# Altium PCB RS485_V1.0.PcbDoc
Units mm, origin at the board's own origin, x right, y up, seen from the top; angles counter-clockwise.
Board outline 35.56 x 20.07 mm, 2 copper layers (Top Layer, Bottom Layer); 16 components, 10 nets, 38 pads, 11 vias.
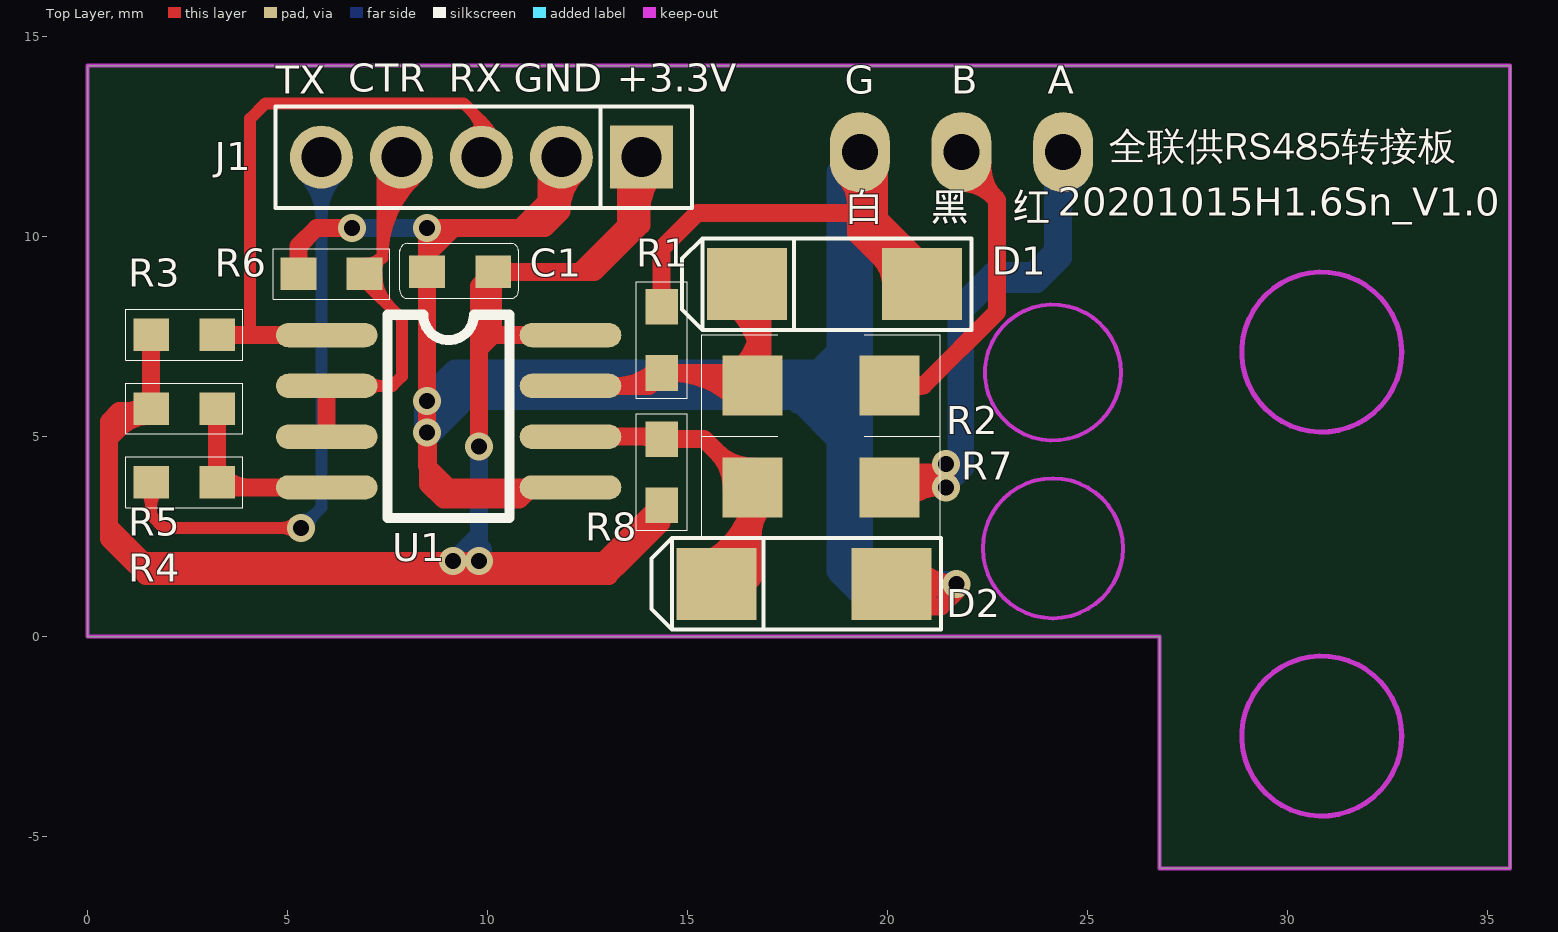
[diagram p0: Top Layer view]
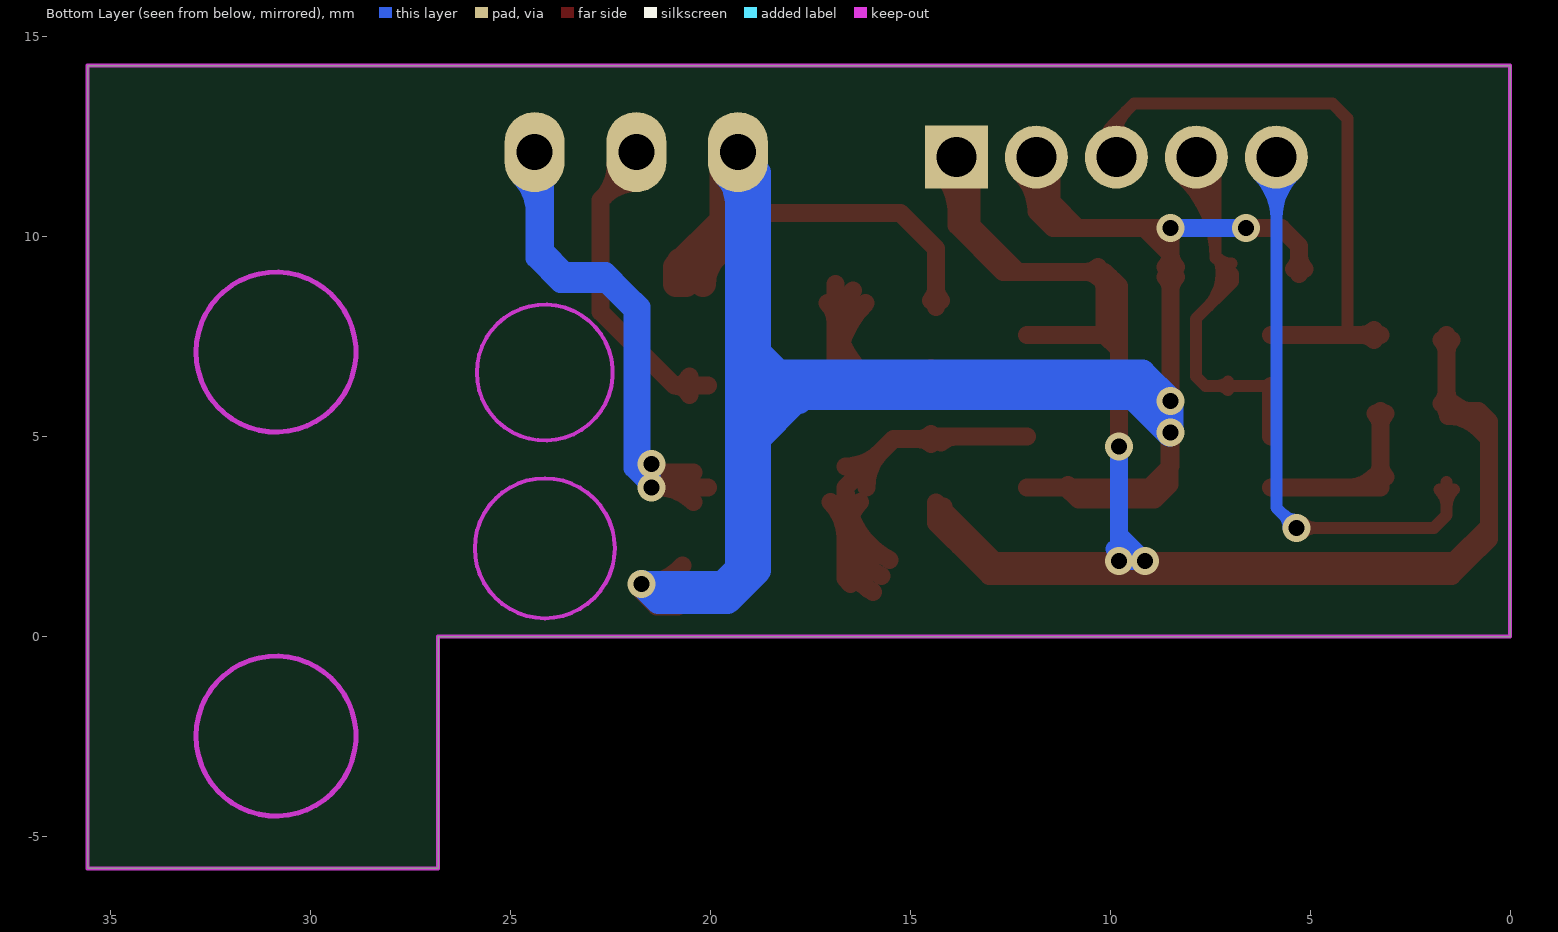
[diagram p1: Bottom Layer view, seen from below]
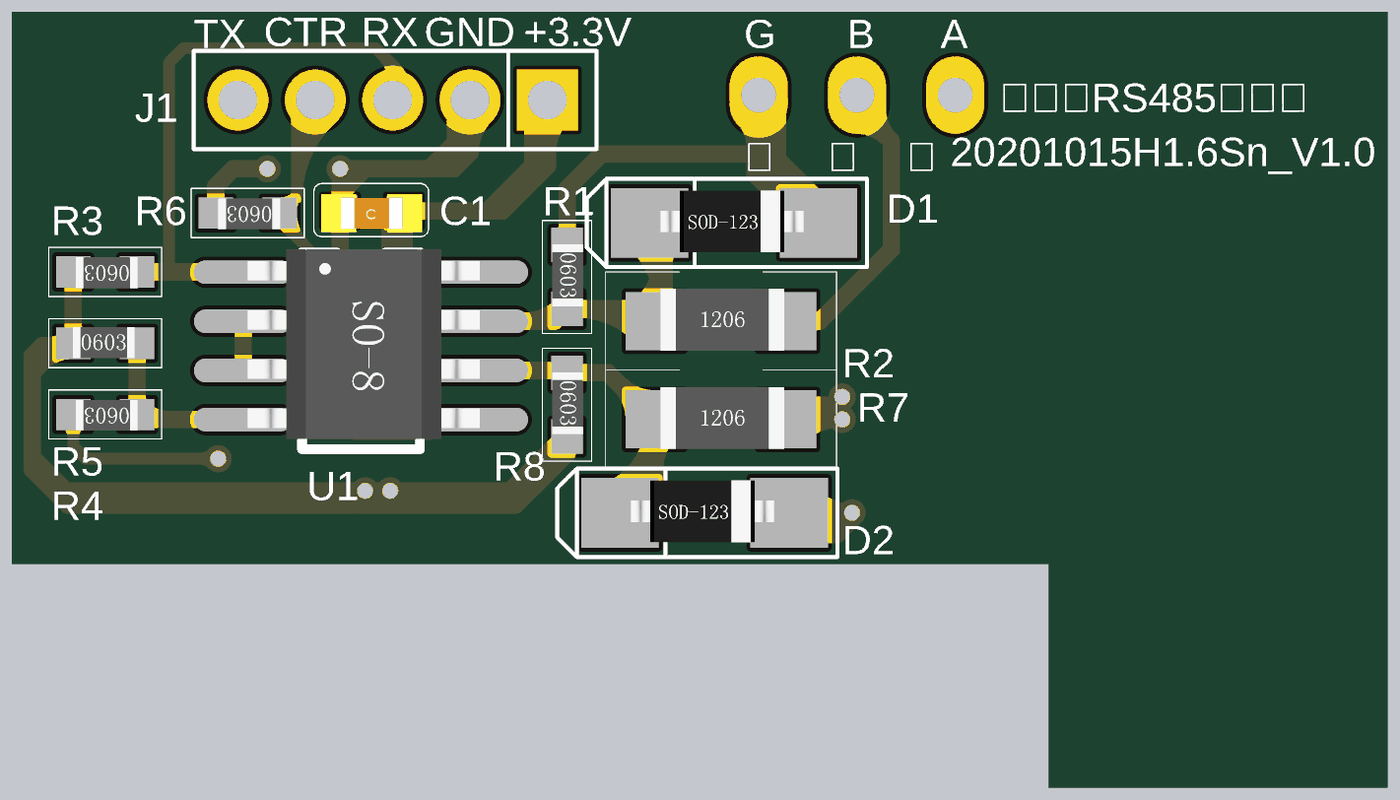
[diagram p2: 3D render of the assembled board from above, using the file's embedded part models]

## Layer stack, top to bottom
Top Layer: signal copper 0.0356
Dielectric: dielectric 0.32, FR-4, Dk 4.8
Bottom Layer: signal copper 0.0356

## Board outline
0,14.277 35.56,14.277 35.56,-5.789 26.797,-5.789 26.797,0 0,0 0,14.277

## Design rules (kind name [scope] priority, off if disabled: settings)
Clearance Clearance_1 [InPolygon] p1: gap=0.6
Clearance [All] p2: gap=0.254
HoleSize [All] p1 off: absolutevalues=TRUE maxlimit=2.54 minlimit=0.025 maxpercent=80.000 minpercent=20.000
HoleToHoleClearance [All] p1 off: gap=0.254 allowstackedmicrovias=TRUE
LayerPairs [All] p1 off: enforce=TRUE
MinimumSolderMaskSliver [All] p1 off: minsoldermaskwidth=0.254
NetAntennae [All] p1 off: netantennaetolerance=0
PolygonConnect PolygonConnect_1 [IsVia] p1: connectstyle=Direct reliefconductorwidth=0.254 reliefentries=4 polygonreliefangle="90 Angle"
PolygonConnect [All] p2: connectstyle=Relief reliefconductorwidth=0.5 reliefentries=4 polygonreliefangle="90 Angle"
RoutingVias [All] p1: holewidth=0.711 width=1.27 viastyle="Through Hole" minholewidth=0.711 minwidth=1.27 maxholewidth=0.711 maxwidth=1.27
SilkToSilkClearance [All] p1 off: silktosilkclearance=0.254
SilkscreenOverComponentPads [All] p1 off: minsilkscreentomaskgap=0.254
SolderMaskExpansion [All] p1: expansion=0.102
Width [All] p1: maxlimit=1.5 minlimit=0.3 preferedwidth=0.65
21 further rules are at their usual default settings.

## Components (designator, comment, footprint, x,y, rotation, side; value= is the part's Value field where it differs from the comment)
C1 "0.1uF/0603" CAP/SMT/0603C 8.509,9.07 r0 top
D1 "SMF6.5CA/SOD-123" D/SMT/SOD123 16.256,8.816 r0 top
D2 "SMF6.5CA/SOD-123" D/SMT/SOD123 15.494,1.323 r0 top
J1 "1X5PIN_2.54MM" CON/DIP/1×5PIN/2.0MM 13.843,11.991 r180 top
R1 "10K/0603" 0603R 14.351,7.419 r270 top
R2 "10K/1206" 1206R 16.637,6.276 r0 top
R3 "10K/0603" 0603R 2.413,7.546 r180 top
R4 "100R/0603" 0603R 2.413,3.863 r180 top
R5 "10K/0603" 0603R 2.413,5.704 r0 top
R6 "10K/0603" 0603R 6.096,9.07 r180 top
R7 "10K/1206" 1206R 16.637,3.736 r0 top
R8 "10K/0603" 0603R 14.351,4.117 r270 top
U1 "SP3485EN" SOIC-8 5.969,7.546 r0 top
白 "1PIN" CON/DIP/1PIN 21.844,12.118 r90 top (schematic designator J3)
红 "1PIN" CON/DIP/1PIN 24.384,12.118 r90 top (schematic designator J4)
黑 "1PIN" CON/DIP/1PIN 19.304,12.118 r90 top (schematic designator J2)

## Footprints (in the part's own frame and the unit in brackets; to place one, negate y for a bottom-side part, rotate by r counter-clockwise, add the part's x,y. Pads: shape width x height; smd on the part's side, far side on the other; paste and mask are expansions set on the pad)
0603R [mil]
  rect 35x32 smd: 1(-32.5,0) 2(32.5,0)
  silkscreen extent -58,-25 58,25, body extent -33,-15 30,16, height 18
1206R [mm]
  rect 1.5x1.5 smd: 1(-0.02,0) 2(3.409,0)
  silkscreen extent -1.29,-1.27 4.68,1.27, body extent 0.13,-0.76 3.33,0.84, height 0.6
CAP/SMT/0603C [mil]
  rect 35x32 smd: 1(-1,1.97) 2(64,1.97)
  silkscreen extent -28,-24 89,30, body extent -20,-20 82,19, height 35
CON/DIP/1PIN [mm]
  oval 2x1.5 hole 0.9: 1(0,0)
CON/DIP/1×5PIN/2.0MM [mil]
  rect 62x62 hole 39.37 mask+4: 1(0,0)
  round 62 hole 39.37 mask+4: 2(78.74,0) 3(157.48,0) 4(236.22,0) 5(314.96,0)
  silkscreen extent -50,-50 360,50
D/SMT/SOD123 [mm]
  rect 2x1.8 smd: 1(0.229,0) 2(4.597,0)
  silkscreen extent -1.4,-1.14 5.84,1.14, body extent 0.51,-0.76 4.21,0.84, height 1.2
SOIC-8 [mil]
  oval 100x24 smd: 1(0.27,-0.17) 2(0.27,-50.17) 3(0.27,-100.17) 4(0.27,-150.17) 5(240.27,-150.17) 6(240.27,-100.17) 7(240.27,-50.17) 8(240.27,-0.17)
  silkscreen extent 60,-180 180,20, body extent 5,-170 241,23, height 67

## Part data
C1: library part CAP/CAP/SMT/0603C
D1 D2: library part D/TVS/SMT/SMF13CA/SOD-123
J1: library part CON/DIP/1X5PIN_2.54MM, "Connector"
R1 R3 R4 R5 R6 R8: library part RES/RES/SMT/0603
R2 R7: library part RES/RES/SMT/1206
U1: library part SP485EN
白 红 黑: library part CON/DIP/1PIN, "Connector"

## Via types
v1: diameter 0.7, hole 0.4, Top Layer to Bottom Layer, tented both sides, 11 vias

## Nets (pads, with @x,y where several pads share a name; then routed paths per layer and width w, separated by ;. In a path a pad name is that pad's centre, name@x,y a point inside that pad or via, vN(x,y) a via of type N, cw(c..) or ccw(c..) an arc to the next point about the centre after c; other vN are vias at no path point)
+3.3V: C1.2 J1.1 R3.2 R5.1 R8.2 U1.8 | length 79.7
  Top Layer w0.45: 0.529,4.953 1.281,5.704 R5.1 ; 0.781,5.205 cw(c1.549,4.436) R5.1@1.549,5.523 ; 0.958,5.641 ccw(c0.958,6.296) R5.1@1.421,5.833 ; 1.397,1.891 0.529,2.759 0.529,2.921 ; R5.1@1.459,5.833 ccw(c1.15,6.142) 1.587,6.142 ccw(c2.025,6.142) R5.1@1.716,5.833 ; R3.2@1.459,7.418 cw(c1.15,7.108) 1.587,7.108 cw(c2.025,7.108) R3.2@1.716,7.418 ; R3.2 1.587,5.641 0.783,5.641 0.529,5.387 0.529,2.921 ; 7.942,1.524 ccw(c7.942,3.079) v1@9.042,1.979 ; 8.591,1.524 ccw(c8.591,3.079) v1@9.691,1.979 ; v1@8.9,1.661 ccw(c9.231,1.992) 9.231,1.524 ; 9.029,1.524 ccw(c9.029,1.992) v1@9.36,1.661 ; v1@9.218,1.979 ccw(c10.318,3.079) 10.318,1.524 ; v1@9.549,1.661 ccw(c9.88,1.992) 9.88,1.524 ; 9.678,1.524 ccw(c9.678,1.992) v1@10.009,1.661 ; v1(9.779,4.752) 9.779,7.186 ; 9.779,7.916 cw(c11.301,7.916) C1.2@10.225,8.992 ; v1@9.867,1.979 ccw(c10.967,3.079) 10.967,1.524 ; C1.2@10.006,8.992 cw(c9.697,8.682) 10.135,8.682 cw(c10.573,8.682) C1.2@10.263,8.992 ; C1.2@10.301,8.992 cw(c10.611,8.682) 10.611,9.12 cw(c10.611,9.558) C1.2@10.301,9.248 ; U1.8 10.135,7.542 ; J1.1@13.445,11.593 cw(c12.485,10.633) 13.843,10.633 cw(c15.201,10.633) J1.1@14.241,11.593 ; 13.462,10.245 cw(c14.987,10.245) J1.1@14.151,11.521 ; 13.462,11.078 cw(c14.441,11.078) J1.1@13.905,11.897 ; 13.754,2.25 ccw(c12.751,3.253) R8.2@14.17,3.253 ; 13.868,2.872 cw(c14.351,2.389) R8.2@14.351,3.072 ; 0.529,2.921 0.529,2.445 1.083,1.891 ; 1.083,1.891 12.954,1.891 ; 1.083,1.891 1.45,1.524 13.028,1.524 13.395,1.891 ; 9.779,7.186 10.135,7.542 ; 9.779,7.186 9.779,8.764 C1.2 ; 10.135,7.542 C1.2 ; C1.2 11.938,9.12 ; 11.938,9.12 12.676,9.12 13.843,10.287 J1.1 13.462,11.61 13.462,10.287 12.295,9.12 11.938,9.12 ; 12.954,1.891 13.395,1.891 ; 12.954,1.891 12.954,1.958 14.351,3.355 14.351,2.847 13.395,1.891
  Bottom Layer w0.45: v1@9.306,2.067 cw(c9.7,1.673) v1@9.89,2.197 ; v1(9.779,4.752) 9.779,2.54 ; 9.779,2.54 v1(9.779,1.891) v1(9.13,1.891) 9.779,2.54
GND: C1.1 D1.2 D2.2 J1.2 R1.1 R6.2 U1.5 黑.1 | length 171
  Top Layer w0.45: R6.2@5.142,9.198 ccw(c4.833,9.508) 5.271,9.508 ccw(c5.708,9.508) R6.2@5.399,9.198 ; R6.2 5.271,9.768 5.715,10.213 v1(6.604,10.213) ; C1.1@8.355,8.992 cw(c8.046,8.682) 8.484,8.682 cw(c8.922,8.682) C1.1@8.612,8.992 ; C1.1@8.355,9.248 ccw(c8.046,9.558) 8.484,9.558 ccw(c8.922,9.558) C1.1@8.612,9.248 ; v1@8.395,5.017 cw(c8.12,4.742) 8.509,4.742 ; v1@8.484,5.207 8.509,5.182 8.509,3.81 8.89,3.429 10.795,3.429 11.098,3.732 U1.5 12.068,3.736 9.017,3.736 8.484,4.269 C1.1 ; 9.144,10.213 8.484,9.553 C1.1 ; 10.183,3.429 ccw(c10.183,4.655) U1.5@11.05,3.788 ; J1.2@11.445,11.593 cw(c10.485,10.633) 11.843,10.633 cw(c13.201,10.633) J1.2@12.241,11.593 ; 11.467,10.823 cw(c12.101,10.823) J1.2@11.964,11.442 ; J1.2@11.843,11.43 11.843,11.261 11.467,10.885 ; R1.1@14.223,8.411 ccw(c13.913,8.721) 14.351,8.721 ccw(c14.789,8.721) R1.1@14.479,8.411 ; R1.1 14.351,9.705 15.24,10.594 19.304,10.594 ; 黑.1@18.933,11.497 cw(c18.037,10.601) 19.304,10.601 cw(c20.571,10.601) 黑.1@19.675,11.497 ; 黑.1 19.304,10.111 D1.2@20.599,8.816 ; 19.381,10.034 ccw(c20.693,11.346) D1.2@20.737,9.491 ; 19.71,9.705 cw(c18.82,8.816) D1.2@20.078,8.816 ; D2.2@20.69,1.777 ccw(c21.717,2.71) v1(21.717,1.323) ; D2.2@20.955,1.016 20.648,1.323 D2.2 v1(21.717,1.323) ; C1.1 v1(8.484,10.213) 10.795,10.213 ; 10.795,10.213 11.43,10.213 11.843,10.626 J1.2 11.467,11.615 11.467,10.885 ; 10.795,10.213 11.467,10.885 ; v1(21.717,1.323) ccw(c21.717,-0.064) 20.69,0.869 20.797,0.762 21.336,0.762 21.717,1.143 v1(21.717,1.323)
  Top Layer w0.65: 黑.1@19.003,11.567 cw(c18.278,10.842) 19.304,10.842 cw(c20.33,10.842) 黑.1@19.605,11.567 ; 黑.1@19.069,11.514 cw(c18.306,10.365) 19.685,10.365 ; 19.509,9.906 ccw(c20.753,11.151) D1.2@20.753,9.391 ; D1.2@19.88,9.535 cw(c19.162,8.816) D1.2@20.178,8.816 ; 19.304,10.111 黑.1 19.685,11.737 19.685,10.414 20.853,9.246 D1.2 20.599,8.816 19.304,10.111
  Bottom Layer w0.45: v1(6.604,10.213) v1(8.484,10.213) ; v1@8.609,5.895 cw(c9.028,5.895) 8.731,6.191 ; 9.271,6.223 9.144,6.35 8.89,6.35 ; 黑.1@18.933,11.497 cw(c18.037,10.601) 19.304,10.601 cw(c20.571,10.601) 黑.1@19.675,11.497 ; 19.304,5.895 17.78,5.895 v1(8.484,5.895) 8.484,5.944 8.89,6.35 ; 19.304,6.477 19.177,6.35 18.796,6.35 18.415,6.35 8.89,6.35 ; 黑.1 19.304,1.704 19.685,1.323 v1(21.717,1.323) 19.939,1.323
  Bottom Layer w0.65: v1@8.484,5.92 ccw(c8.484,8.009) 9.961,6.532 ; 9.144,6.35 18.415,6.35 ; 10.541,6.604 10.033,6.604 8.509,5.08 v1(8.484,5.105) v1(8.484,5.895) 9.193,6.604 18.923,6.604 19.304,6.985 ; 17.78,5.895 17.854,5.895 18.796,4.953 ; 18.796,6.35 18.796,1.651 19.558,0.889 21.283,0.889 v1(21.717,1.323) 19.685,1.323 19.304,1.704 黑.1 18.796,11.61 18.796,7.112 18.415,6.731 18.415,6.35 ; 18.796,9.616 cw(c21.556,9.616) 19.605,11.567 ccw(c20.33,10.842) 19.304,10.842 ccw(c18.278,10.842) 黑.1@19.003,11.567 ; 18.796,11.185 cw(c19.987,11.185) 黑.1@19.145,12.027 ; 19.304,5.334 19.304,5.461 18.415,6.35 ; 20.609,0.889 ccw(c20.609,2.431) v1@21.699,1.341
NetD1_1: D1.1 R1.2 R2.1 U1.7 | length 18.3
  Top Layer w0.45: U1.7 14.029,6.272 R1.2 16.3,6.593 R2.1 16.866,6.525 D1.1@16.866,8.816 ; U1.7@13.228,6.272 ccw(c13.228,7.678) R1.2@14.223,6.684 ; R1.2@14.479,6.465 cw(c14.789,6.156) 14.789,6.593 cw(c14.789,7.031) R1.2@14.479,6.722 ; R1.2@14.583,6.593 cw(c14.583,4.242) R2.1@16.246,5.905 ; 15.67,6.593 cw(c15.67,5.328) R2.1@16.564,6.223 ; D1.1@16.108,8.339 cw(c14.277,6.508) R2.1@16.866,6.508 ; R2.1@16.246,6.647 ccw(c14.75,8.144) D1.1@16.866,8.144 ; D1.1@16.426,8.657 cw(c15.363,7.594) 16.866,7.594 ; R2.1@16.564,6.329 ccw(c15.836,7.057) 16.866,7.057 ; 16.866,7.865 cw(c17.536,7.865) D1.1@17.062,8.339
NetD2_1: D2.1 R7.1 R8.1 U1.6 | length 18.1
  Top Layer w0.45: U1.6 14.292,5.002 R8.1 15.411,4.942 R7.1 ; 13.862,5.002 cw(c13.862,4.492) R8.1@14.223,4.852 ; R8.1@14.479,4.814 cw(c14.789,4.505) 14.789,4.942 cw(c14.789,5.38) R8.1@14.479,5.071 ; D2.1@15.513,1.923 ccw(c14.577,3.736) R7.1 ; D2.1@15.72,1.523 ccw(c14.958,2.997) R7.1@16.617,2.997 ; D2.1@15.926,1.123 ccw(c15.34,2.258) 16.617,2.258 ; R7.1@16.092,3.736 ccw(c14.825,3.736) 15.721,4.632 ccw(c16.617,5.528) R7.1@16.617,4.261 ; R7.1@16.246,3.365 cw(c15.35,2.469) 16.617,2.469 cw(c17.885,2.469) R7.1@16.989,3.365 ; D2.1@16.485,1.323 16.617,1.455 R7.1
NetR4_1: R4.1 R5.2 U1.4 | length 6.7
  Top Layer w0.45: R4.1@3.11,3.991 ccw(c2.801,4.301) 3.238,4.301 ccw(c3.676,4.301) R4.1@3.367,3.991 ; R5.2@3.11,5.576 cw(c2.801,5.267) 3.238,5.267 cw(c3.676,5.267) R5.2@3.367,5.576 ; R5.2@3.238,5.641 3.238,3.736 3.243,3.732 U1.4 ; R4.1@3.405,3.991 ccw(c4.031,4.618) 4.031,3.732
RS485_CTRL3: J1.4 R6.1 U1.2 U1.3 | length 17.3
  Top Layer w0.3: U1.2 7.616,6.272 7.855,6.511 7.855,7.946 6.921,8.879 R6.1 7.366,9.514 ; R6.1@6.96,9.326 ccw(c6.96,9.853) 7.332,9.481 ; U1.2@7.05,6.162 cw(c7.315,5.898) 7.315,6.272 cw(c7.315,6.646) U1.2@7.05,6.381 ; R6.1@7.215,9.094 cw(c7.737,9.144) 7.366,9.514 ; R6.1@7.216,9.07 ccw(c8.387,9.07) 7.559,8.242 ; 7.366,9.469 cw(c10.139,9.469) J1.4@8.272,11.52 ; 7.366,10.148 cw(c9.521,10.148) J1.4@8.07,11.742 ; 7.366,10.827 cw(c8.903,10.827) J1.4@7.868,11.963 ; J1.4 7.366,11.514 7.366,9.514
  Top Layer w0.45: U1.3 U1.2
RS485A1: R7.2 红.1 | length 28.1
  Top Layer w0.45: R7.2 v1(21.463,3.736) v1(21.463,4.318) 21.252,4.107 20.418,4.107 ccw(c21.314,5.003) 21.314,3.736 ccw(c21.314,2.469) R7.2@20.418,3.365
  Bottom Layer w0.45: 红.1@24.013,11.497 cw(c23.117,10.601) 24.384,10.601 cw(c25.651,10.601) 红.1@24.755,11.497 ; 21.933,8.143 22.606,8.816 23.749,8.816 24.384,9.451 红.1 24.13,11.864 24.13,9.652 23.622,9.144 22.606,9.144 22.098,8.636 ; 21.933,8.143 21.933,5.387 21.933,4.206 v1(21.463,3.736) v1(21.463,4.318) 21.717,4.572 21.717,8.255 22.098,8.636 ; 21.933,8.143 21.933,8.255 21.933,8.471 22.098,8.636
RS485B1: R2.2 白.1 | length 10.6
  Top Layer w0.45: R2.2 20.89,6.276 ; R2.2@20.517,6.044 cw(c20.89,5.86) 20.89,6.276 ; R2.2@20.517,6.508 ccw(c20.89,6.692) 20.89,6.276 ; 白.1@21.844,11.343 cw(c21.844,10.213) 22.643,11.012 ; 白.1 21.844,11.811 22.733,10.922 22.733,8.119 20.89,6.276 ; 白.1@22.368,11.837 ccw(c23.522,11.768) 22.704,10.951
UART3_RXD: J1.3 R3.1 U1.1 | length 18.9
  Top Layer w0.3: 4.064,7.546 4.064,12.954 4.445,13.335 9.398,13.335 9.843,12.89 ; 9.582,13.151 cw(c8.84,12.409) J1.3@9.808,12.005 ; J1.3@9.632,12.592 ccw(c9.528,12.89) 9.843,12.89 ; J1.3 9.843,12.89 ; 9.899,12.834 cw(c9.287,12.223) J1.3@10.085,11.89 ; J1.3@10.054,12.592 cw(c10.158,12.89) 9.843,12.89
  Top Layer w0.45: R3.1 5.972,7.546 U1.1 ; R3.1@3.405,7.418 cw(c3.715,7.108) 3.715,7.546 cw(c3.715,7.984) R3.1@3.405,7.674
UART3_TXD: J1.5 R4.2 | length 20.4
  Top Layer w0.3: R4.2@1.406,3.682 cw(c0.968,3.244) 1.588,3.244 cw(c2.207,3.244) R4.2@1.769,3.682 ; R4.2 1.587,3.037 1.905,2.72 v1(5.334,2.72) ; v1@5.193,2.579 ccw(c4.851,2.237) 4.851,2.72 ccw(c4.851,3.203) v1@5.193,2.861
  Bottom Layer w0.3: v1(5.334,2.72) 5.843,3.229 J1.5 ; v1@5.334,2.92 ccw(c5.334,3.403) 5.675,3.061 ccw(c6.017,2.72) v1@5.534,2.72 ; J1.5@5.392,11.54 cw(c4.304,10.452) 5.843,10.452 cw(c7.382,10.452) J1.5@6.294,11.54 ; J1.5@5.604,11.752 cw(c5.028,11.176) 5.843,11.176 cw(c6.658,11.176) J1.5@6.082,11.752

## Keep-outs
Keep-Out Layer:
  circle w0.1: c24.131,6.604 r1.7
  circle w0.127: c30.852,7.116 r2
  circle w0.127: c30.852,-2.484 r2
  circle w0.1: c24.131,2.212 r1.75
  lines w0.1: 0,0 0,14.277 35.56,14.277 35.56,-5.789 26.797,-5.789 26.797,0 0,0

## Silkscreen, mask and mechanical layers (free items; w line width, h text height)
Top Overlay:
  text "CTR" at 6.511,13.388 h1.2
  text "RX" at 9.034,13.388 h1.2
  text "GND" at 10.657,13.388 h1.2
  text "+3.3V" at 13.223,13.388 h1.2
  text "TX" at 4.699,13.335 h1.2
  text "G" at 18.923,13.335 h1.2
  text "B" at 21.59,13.335 h1.2
  text "A" at 24.003,13.335 h1.2
  text "全联供RS485转接板" at 25.527,11.684 h1.2
  text "20201015H1.6Sn_V1.0" at 24.257,10.287 h1.2